# Altium PCB ZAtechSensor3 v1_01.PCBDOC
Units mm, origin at the board's own origin, x right, y up, seen from the top; angles counter-clockwise.
Board outline 105.16 x 62.5 mm, 2 copper layers (Top Layer, Bottom Layer); 17 components, 29 nets, 141 pads, 107 vias.
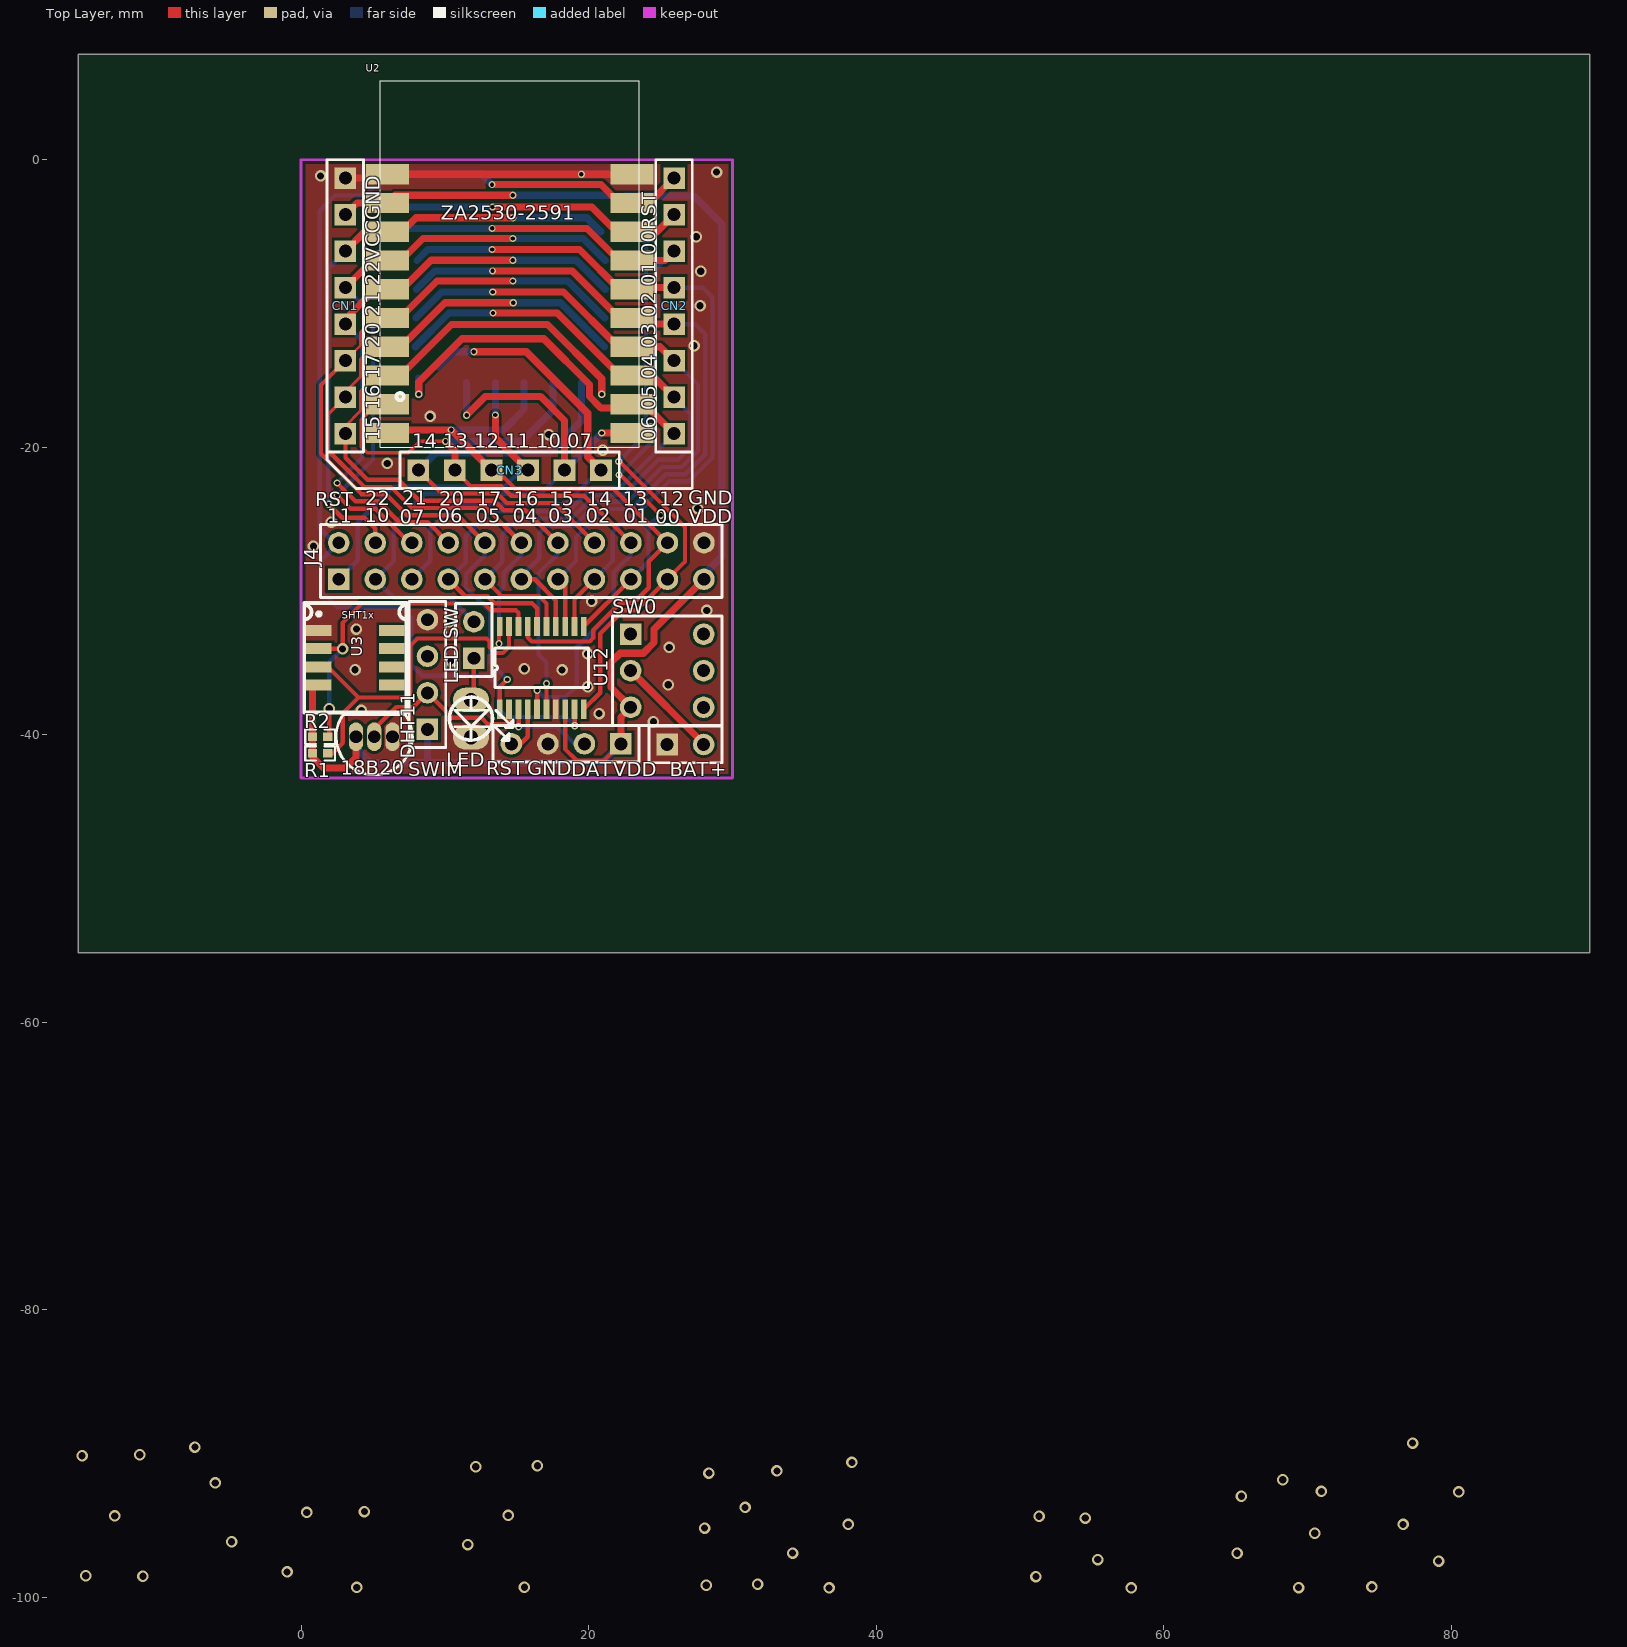
[diagram p0: Top Layer view]
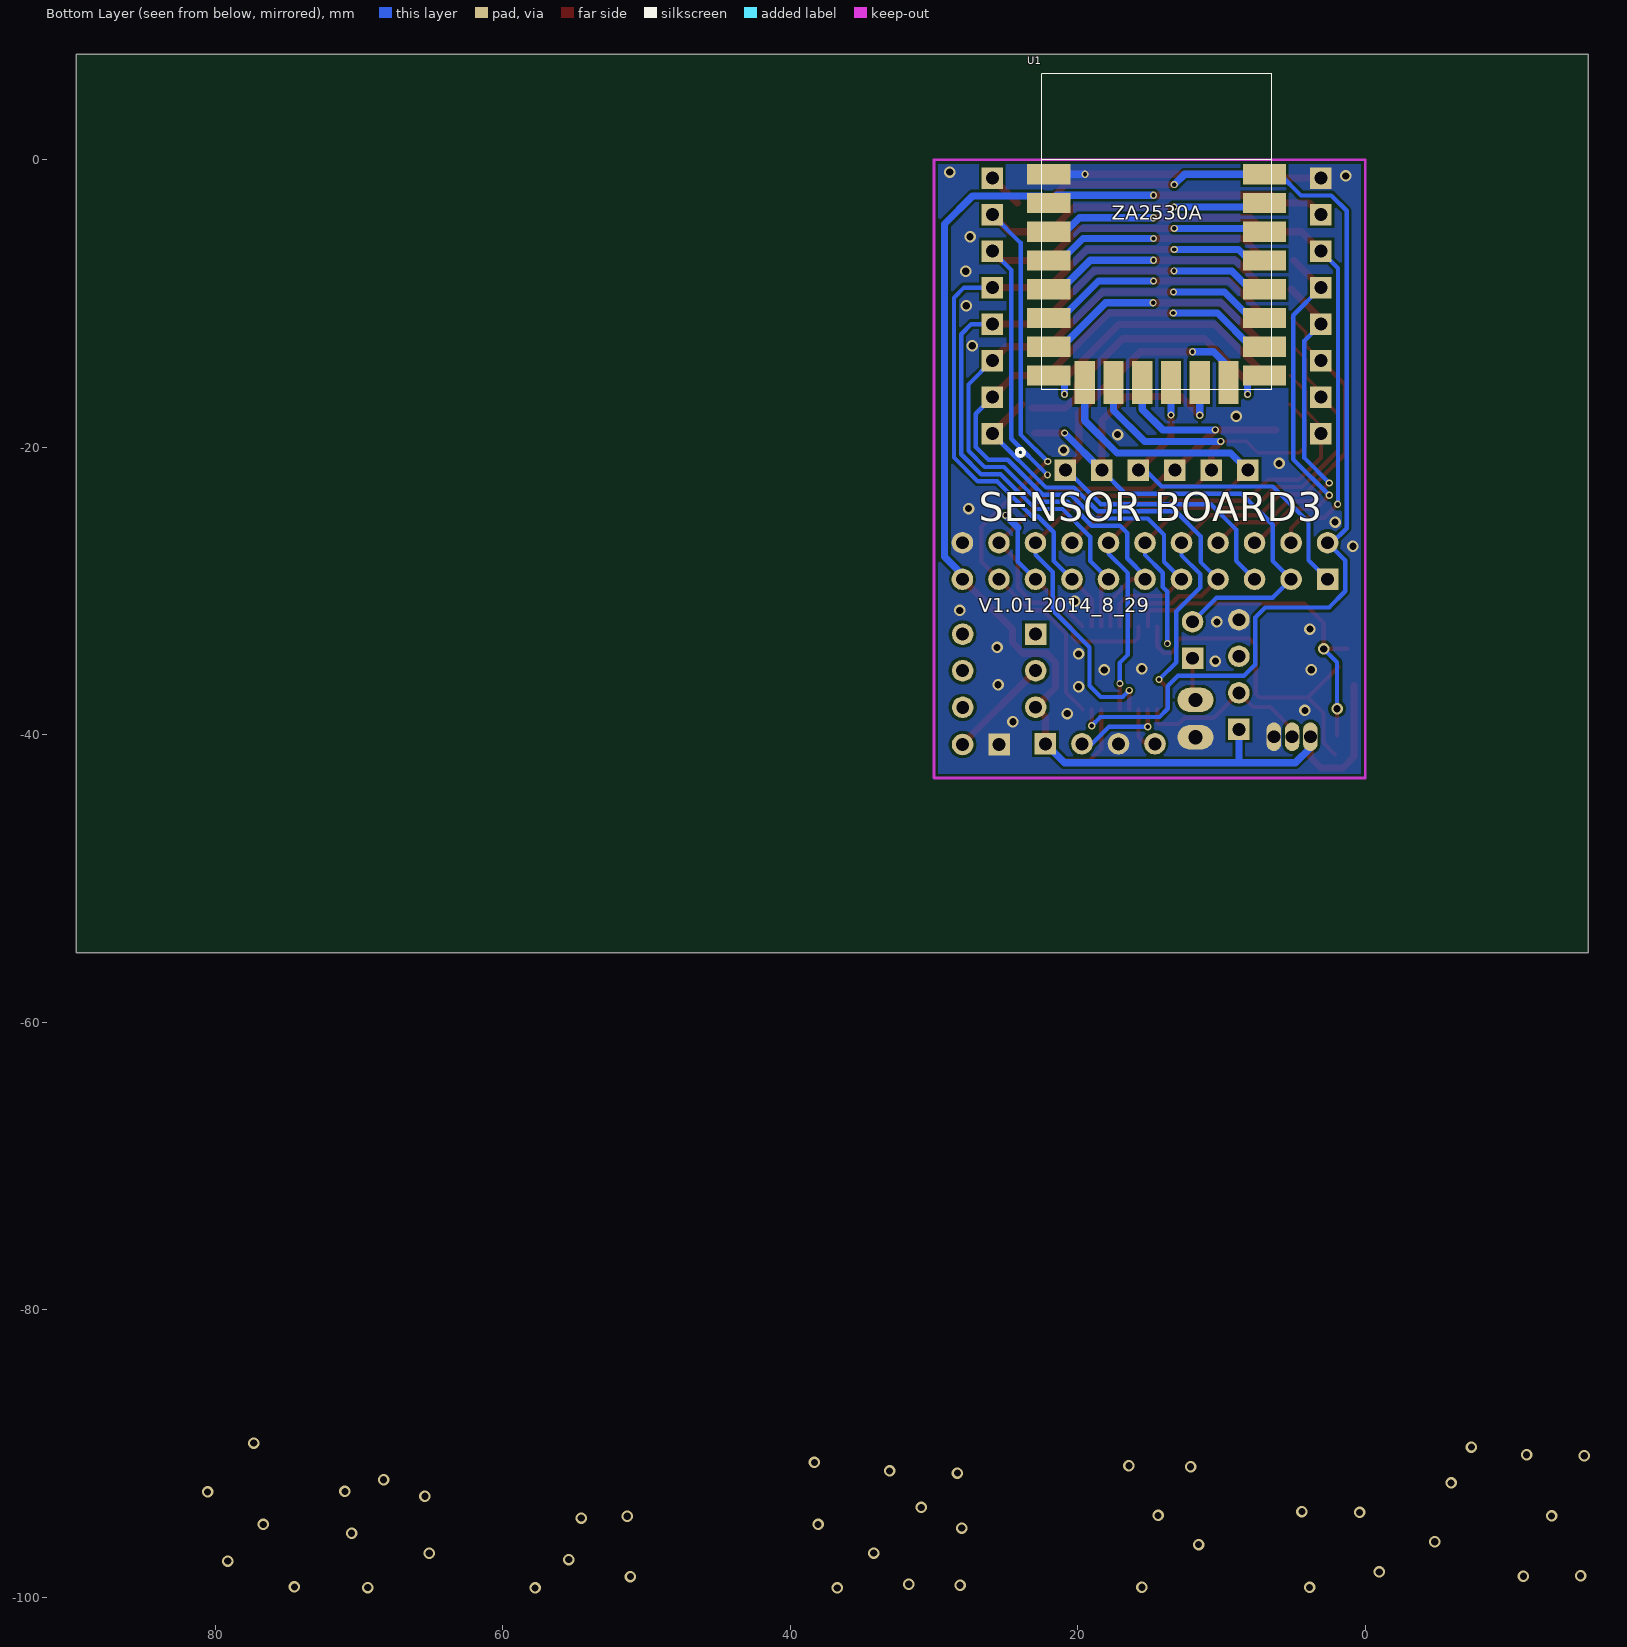
[diagram p1: Bottom Layer view, seen from below]

## Layer stack, top to bottom
Top Layer: signal copper 0.0356
Dielectric: dielectric 0.32, FR-4, Dk 4.8
Bottom Layer: signal copper 0.0356

## Board outline
-14.365,7.333 89.651,7.333 89.651,-55.168 -15.505,-55.168 -15.505,7.333

## Design rules (kind name [scope] priority, off if disabled: settings)
Clearance [All] p1: gap=0.2
ComponentClearance [All] p1 off: gap=0.254 collisioncheckmode=0
HoleSize [All] p1: absolutevalues=TRUE maxlimit=3 minlimit=0 maxpercent=80.000 minpercent=20.000
PolygonConnect [All] p1: connectstyle=Direct reliefconductorwidth=0.5 reliefentries=4 polygonreliefangle="90 Angle"
RoutingVias [All] p1: holewidth=0.5 width=0.8 viastyle="Through Hole" minholewidth=0.3 minwidth=0.5 maxholewidth=1 maxwidth=1
SolderMaskExpansion [All] p1: expansion=0.102
TestPointUsage [All] p1: valid=0 allowmultiple=FALSE
Testpoint [All] p1: side=15 testpointundercomponent=TRUE minsize=1.016 maxsize=2.54 preferedsize=1.524 minholesize=0 maxholesize=1.016 preferedholesize=0.813 testpointgrid=0.025 style=1023 order=1234567890
Width [All] p1: maxlimit=3 minlimit=0.2 preferedwidth=0.254 toplayer_prefwidth=0.3 bottomlayer_prefwidth=0.5 minimp=50.000000 maximp=50.000000 favimp=50.000000
16 further rules are at their usual default settings.

## Components (designator, comment, footprint, x,y, rotation, side; value= is the part's Value field where it differs from the comment)
18B20 "18B20" BCY-W3 5.085,-40.132 r90 top
BAT "BAT" HDR1X2 25.463,-40.671 r0 top
CN1 "" HDR1X8 3.08,-1.27 r270 top locked (schematic designator C1)
CN2 "" HDR1X8 25.94,-1.27 r270 top locked (schematic designator C2)
CN3 "" HDR1X6 8.16,-21.59 r0 top locked (schematic designator C3)
DHT11 "DHT11" HDR1X4 8.787,-39.614 r90 top
J4 "IO" HDR2X11_CEN 2.618,-29.178 r0 top
LED "LED3" LED1-3MM 11.81,-38.688 r270 top
"LED SW" "LED SW" HDR1X2 12.011,-34.673 r90 top
R1 "4.7K" 0402 0.79,-41.283 r90 top
R2 "4.7K" 0402 0.79,-40.13 r90 top
SW0 "SWITCH" SW5 22.921,-32.998 r0 top
SWIM "RST  GND  DATA  VDD" HDR1X4 22.243,-40.621 r180 top
U1 "ZigbeeModule1" 2530Module1 22.51,-16 r180 bottom locked
U2 "ZigbeeModule" 2591Module 5.51,-20 r0 top locked
U3 "SHT10" SHT10 3.775,-34.638 r0 top
U12 "STM8L101F3" TSSOP20 13.815,-38.211 r90 top

## Footprints (in the part's own frame and the unit in brackets; to place one, negate y for a bottom-side part, rotate by r counter-clockwise, add the part's x,y. Pads: shape width x height; smd on the part's side, far side on the other; paste and mask are expansions set on the pad)
0402 [mm]
  rect 0.6x0.635 smd: 1(0,0) 2(-0.004,-1.062)
  silkscreen extent -0.51,-1.56 0.5,0.5
2530Module1 [mm]
  rect 3x1.4 smd: GND(0.5,15) P0.0(15.5,13) P0.1(15.5,11) P0.2(15.5,9) P0.3(15.5,7) P0.4(15.5,5) P0.5(15.5,3) P0.6(15.5,1) P1.5(0.5,1) P1.6(0.5,3) P1.7(0.5,5) P2.0(0.5,7) P2.1(0.5,9) P2.2(0.5,11) RST(15.5,15) VDD(0.5,13)
  rect 1.4x3 smd: P0.7(13,0.5) P1.0(11,0.5) P1.1(9,0.5) P1.2(7,0.5) P1.3(5,0.5) P1.4(3,0.5)
  silkscreen extent 0,0 16,22
2591Module [mm]
  rect 3x1.4 smd: GND(0.5,19) GND(17.5,19) P0.0(17.5,15) P0.1(17.5,13) P0.2(17.5,11) P0.3(17.5,9) P0.4(17.5,7) P0.5(17.5,5) P0.6(17.5,3) P1.0(17.5,1) P1.2(0.5,1) P1.3(0.5,3) P1.5(0.5,5) P1.6(0.5,7) P1.7(0.5,9) P2.0(0.5,11) P2.1(0.5,13) P2.2(0.5,15) RST(17.5,17) VDD(0.5,17)
  silkscreen extent 0,0 18,25.5
BCY-W3 [mm]
  oval 2x1 hole 0.9: 1(0,-1.27) 2(0,0) 3(0,1.27)
  silkscreen extent -2.65,-2.65 1.55,2.65
HDR1X2 [mm] "Connector; Header; 2 Position"
  rect 1.5x1.5 hole 0.9: 1(0,0)
  round 1.5 hole 0.9: 2(2.54,0)
  silkscreen extent -1.27,-1.27 3.81,1.27
HDR1X4 [mm] "Connector; Header; 4 Position"
  rect 1.5x1.5 hole 0.9: 1(0,0)
  round 1.5 hole 0.9: 2(2.54,0) 3(5.08,0) 4(7.62,0)
  silkscreen extent -1.27,-1.27 8.89,1.27
HDR1X6 [mm] "Connector; Header; 6 Position"
  rect 1.5x1.5 hole 0.9: 1(0,0) 2(2.54,0) 3(5.08,0) 4(7.62,0) 5(10.16,0) 6(12.7,0)
  silkscreen extent -1.27,-1.27 13.97,1.27
HDR1X8 [mm] "Connector; Header; 8 Position"
  rect 1.5x1.5 hole 0.9: 1(0,0) 2(2.54,0) 3(5.08,0) 4(7.62,0) 5(10.16,0) 6(12.7,0) 7(15.24,0) 8(17.78,0)
  silkscreen extent -1.27,-1.27 19.05,1.27
HDR2X11_CEN [mm] "Connector; Header; 11x2 Position"
  rect 1.5x1.5 hole 0.9: 1(0,0)
  round 1.5 hole 0.9: 2(2.54,0) 3(5.08,0) 4(7.62,0) 5(10.16,0) 6(12.7,0) 7(15.24,0) 8(17.78,0) 9(20.32,0) 10(22.86,0) 11(25.4,0) 12(0,2.54) 13(2.54,2.54) 14(5.08,2.54) 15(7.62,2.54) 16(10.16,2.54) 17(12.7,2.54) 18(15.24,2.54) 19(17.78,2.54) 20(20.32,2.54) 21(22.86,2.54) 22(25.4,2.54)
  silkscreen extent -1.27,-1.27 26.67,3.81
LED1-3MM [mm]
  oval 1.7x2.5 hole 0.991: 1(-1.117,0.002) 2(1.483,0.002)
  silkscreen extent -1.32,-1.49 1.71,2.92
SHT10 [mil]
  rect 70x30 smd: 1(-100,75) 2(-100,25) 3(-100,-25) 4(-100,-75) 5(100,-75) 6(100,-25) 7(100,25) 8(100,75)
  silkscreen extent -140,-150 140,150
SW5 [mm]
  round 1.5 hole 0.9: 1(0,-2.54) 3(0,-5.08) 4(5.08,-2.54) 5(5.08,0) 6(5.076,-5.086)
  rect 1.5x1.5 hole 0.9: 2(0,0)
  silkscreen extent -1.27,-6.35 6.35,1.27
TSSOP20 [mm]
  rect 1.35x0.4 smd: 1(0,0) 2(0,-0.65) 3(0,-1.3) 4(0,-1.95) 5(0,-2.6) 6(0,-3.25) 7(0,-3.9) 8(0,-4.55) 9(0,-5.2) 10(0,-5.85) 11(5.75,-5.85) 12(5.75,-5.2) 13(5.75,-4.55) 14(5.75,-3.9) 15(5.75,-3.25) 16(5.75,-2.6) 17(5.75,-1.95) 18(5.75,-1.3) 19(5.75,-0.65) 20(5.75,0)
  silkscreen extent 1.51,-6.18 4.24,0.33

## Part data
18B20: library part NPN, "NPN Bipolar Transistor"
BAT: library part CON2
CN1 CN2: library part Cap, "0603U"
CN3: library part "Header 6", "Header, 6-Pin"
DHT11 SWIM: library part "Header 4", "Header, 4-Pin"
J4: library part CON3, "Connector"
LED: "Typical BLUE SiC LED"
"LED SW" SW0: library part SW-SPST, "Single-Pole, Single-Throw Switch"
R1 R2: library part Res2, "Resistor"
U1 U2: library part Component_1

## Via types
v1: diameter 0.8, hole 0.5, Top Layer to Bottom Layer, 73 vias
v2: diameter 0.5, hole 0.3, Top Layer to Bottom Layer, 34 vias

## Nets (pads, with @x,y where several pads share a name; then routed paths per layer and width w, separated by ;. In a path a pad name is that pad's centre, name@x,y a point inside that pad or via, vN(x,y) a via of type N, cw(c..) or ccw(c..) an arc to the next point about the centre after c; other vN are vias at no path point)
"18B20/DHT11 DATA": 18B20.2 DHT11.2 U12.2 | length 12.3
  Top Layer w0.3: 18B20.2@5.085,-39.59 6.612,-38.063 7.798,-38.063 DHT11.2 10.529,-38.816 12.545,-38.816 12.968,-39.239 14.382,-39.239 14.465,-39.156 U12.2
+3.3V: 18B20.3 CN1.2 DHT11.1 J4.11 R1.1 R2.1 SW0.3 SWIM.1 U1.VDD U2.VDD U3.4 U12.8 | length 106.3
  Top Layer w0.3: U12.8 18.365,-40.982 19.172,-41.789 21.075,-41.789 SWIM.1
  Top Layer w0.5: U3.4@0.79,-36.563 0.79,-41.54 1.55,-42.3 3.084,-42.3 3.815,-41.569 18B20.3 ; CN1.2 3.89,-3 U2.VDD ; U2.VDD@6.543,-2.467 v2(14.729,-2.467) ; SWIM.1 22.243,-38.756 SW0.3 21.545,-36.702 21.545,-34.963 22.19,-34.318 23.803,-34.318 24.54,-33.581 24.54,-32.656 J4.11
  Bottom Layer w0.5: 18B20.3@3.815,-40.893 4.867,-41.945 20.919,-41.945 SWIM.1 ; 8.787,-41.918 DHT11.1 ; v2(14.729,-2.467) U1.VDD@21.477,-2.467 ; U1.VDD@22.503,-2.507 27.306,-2.507 29.257,-4.458 29.257,-27.619 J4.11@27.701,-29.175
"+3.3V IN": BAT.2 SW0.1 | length 7.2
  Top Layer w0.5: SW0.1 BAT.2@28.017,-40.634
GND: 18B20.1 BAT.1 CN1.1 DHT11.4 J4.22 LED.2 SWIM.3 U1.GND U2.GND U3.1 U12.7 | length 22.2
  Top Layer w0.5: CN1.1 U2.GND@5.74,-1.27 ; U2.GND@6.01,-1 U2.GND@23.01,-1
  Bottom Layer w0.5: v2(19.492,-1) U1.GND
  other v1: 36.726,-99.335 57.743,-99.335 69.379,-99.32 3.871,-99.305 15.534,-99.297 74.482,-99.272 28.183,-99.149 31.755,-99.087 51.113,-98.553 -11.008,-98.528 -14.985,-98.497 -0.973,-98.226 79.117,-97.469 55.408,-97.367 65.109,-96.933 34.189,-96.913 11.587,-96.328 -4.839,-96.134 70.506,-95.538 28.059,-95.173 38.061,-94.924 76.652,-94.927 54.538,-94.486 51.329,-94.358 -12.965,-94.334 14.406,-94.298 0.392,-94.086 4.399,-94.024 30.886,-93.744 65.41,-92.967 80.525,-92.659 70.967,-92.626 -5.976,-92.041 68.286,-91.818 28.369,-91.352 33.091,-91.197 12.151,-90.915 16.436,-90.84 38.31,-90.606 -15.233,-90.141 -11.226,-90.079 -7.386,-89.54 77.317,-89.269 24.505,-39.092 20.722,-38.524 4.198,-38.296 19.935,-36.657 25.535,-36.515 18.151,-35.487 3.749,-35.473 15.528,-35.398 10.422,-34.863 19.935,-34.375 25.607,-33.913 3.85,-32.644 10.315,-32.143 28.209,-31.347 20.206,-30.716 0.857,-26.884 2.095,-25.2 27.595,-24.263 5.989,-21.12 20.979,-20.196 17.227,-19.112 8.973,-17.855 27.334,-12.937 27.753,-10.155 27.791,-7.754 27.486,-5.353 1.353,-1.122 28.896,-0.856
I2CSCK: R1.2 U3.3 U12.19 | length 24.1
  Top Layer w0.3: U3.3@1.873,-35.273 3.995,-37.395 ; R1.2@2.097,-41.36 2.904,-40.553 2.904,-38.487 3.995,-37.395 ; U12.19 14.465,-33.873 14.034,-34.304 13.517,-34.304 13.111,-33.898 13.111,-33.514 12.899,-33.302 8.088,-33.302 7.605,-33.785 7.605,-37.157 7.367,-37.395 3.995,-37.395
I2CSDA: R2.2 U3.2 U12.18 | length 23.9
  Top Layer w0.3: U3.2@1.252,-34.02 v1(2.885,-34.02) 2.885,-32.214 4.242,-30.857 12.725,-30.857 13.208,-31.34 14.951,-31.34 15.115,-31.504 U12.18 ; R2.2@1.962,-40.035 v1(1.962,-38.189)
  Bottom Layer w0.3: v1(1.962,-38.189) 1.962,-34.943 v1(2.885,-34.02)
LED_SW: "LED SW.1" LED.1 | length 2.4
  Top Layer w0.3: LED.1@12.011,-37.043 12.011,-34.673
P0.0/A0.0: CN2.2 J4.10 U1.P0.0 U2.P0.0 U12.10 | length 60.2
  Top Layer w0.3: U12.10 20.809,-37.067 20.809,-32.958 22.442,-31.325 23.331,-31.325 24.007,-30.649 J4.10 26.704,-27.952 26.704,-25.54 22.155,-20.991 v2(22.087,-20.991)
  Top Layer w0.5: v2(13.307,-3.28) 20.216,-3.28 U2.P0.0@21.936,-5 ; U2.P0.0 24.75,-5 CN2.2
  Bottom Layer w0.3: v2(22.087,-20.991) 23.971,-19.107 23.971,-5.779 CN2.2
  Bottom Layer w0.5: U1.P0.0@7.29,-3.28 v2(13.307,-3.28)
P0.1/A0.1: CN2.3 J4.9 U1.P0.1 U2.P0.1 U12.11 | length 50.2
  Top Layer w0.3: U12.11 19.665,-32.451 J4.9 ; v2(22.105,-21.918) 22.21,-21.918 v2(25.025,-24.733)
  Top Layer w0.5: v2(13.285,-4.77) 19.877,-4.77 U2.P0.1@22.107,-7 ; U2.P0.1 25.29,-7 CN2.3
  Bottom Layer w0.3: v2(22.105,-21.918) 24.621,-19.402 24.621,-7.669 CN2.3 ; J4.9 24.162,-27.954 24.162,-25.596
  Bottom Layer w0.5: U1.P0.1@7.24,-4.77 v2(13.285,-4.77) ; 24.162,-25.596 v2(25.025,-24.733)
P0.2/A0.2: CN2.4 J4.8 U1.P0.2 U2.P0.2 U12.12 | length 49.2
  Top Layer w0.3: U12.12 19.015,-30.561 J4.8
  Top Layer w0.5: v2(13.285,-6.237) 19.358,-6.237 U2.P0.2@22.121,-9 ; U2.P0.2@23.12,-8.89 CN2.4
  Bottom Layer w0.3: J4.8 21.668,-27.908 21.668,-25.909 22.783,-24.794 23.17,-24.794 25.597,-22.367 26.948,-22.367 28.611,-20.704 28.611,-9.592 27.909,-8.89 CN2.4
  Bottom Layer w0.5: U1.P0.2@8.052,-7 8.815,-6.237 v2(13.285,-6.237)
P0.3/A0.3: CN2.5 J4.7 U1.P0.3 U2.P0.3 U12.13 | length 47.3
  Top Layer w0.3: U12.13 J4.7@18.365,-29.337
  Top Layer w0.5: v2(13.307,-7.727) 18.861,-7.727 U2.P0.3@22.134,-11 ; U2.P0.3@23.44,-11.43 CN2.5
  Bottom Layer w0.3: J4.7 19.126,-27.91 19.126,-26.23 21.062,-24.294 22.941,-24.294 25.368,-21.867 26.716,-21.867 28.107,-20.476 28.107,-12.131 27.406,-11.43 CN2.5
  Bottom Layer w0.5: U1.P0.3@8.016,-9 9.289,-7.727 v2(13.307,-7.727)
P0.4/A0.4: CN2.6 J4.6 U1.P0.4 U2.P0.4 U12.14 | length 48.8
  Top Layer w0.3: J4.6 16.248,-29.178 17.715,-30.645 U12.14
  Top Layer w0.5: v2(13.33,-9.195) 18.252,-9.195 U2.P0.4@22.057,-13 ; U2.P0.4 24.97,-13 CN2.6
  Bottom Layer w0.3: J4.6@15.001,-29.175 15.158,-29.018 J4.6@15.266,-28.91 ; J4.6@15.318,-28.963 16.559,-27.722 16.559,-25.958 17.065,-25.452 19.023,-25.452 20.681,-23.794 22.697,-23.794 25.124,-21.367 26.476,-21.367 27.6,-20.243 27.6,-15.63 CN2.6
  Bottom Layer w0.5: U1.P0.4@7.98,-11 9.785,-9.195 v2(13.33,-9.195)
P0.5/A0.5: CN2.7 J4.5 U1.P0.5 U2.P0.5 U12.15 | length 50.3
  Top Layer w0.3: J4.5 13.94,-30.34 16.544,-30.34 17.065,-30.861 U12.15
  Top Layer w0.5: v2(13.352,-10.662) 17.822,-10.662 U2.P0.5@22.16,-15 ; U2.P0.5 24.43,-15 CN2.7
  Bottom Layer w0.3: J4.5 13.992,-27.964 13.992,-26.081 15.121,-24.952 18.816,-24.952 20.474,-23.294 22.433,-23.294 24.86,-20.867 26.209,-20.867 27.094,-19.982 27.094,-17.664 CN2.7
  Bottom Layer w0.5: U1.P0.5@7.944,-13 10.282,-10.662 v2(13.352,-10.662)
P0.6/A0.6: CN2.8 J4.4 U1.P0.6 U2.P0.6 U12.16 | length 52.8
  Top Layer w0.3: J4.4 11.417,-30.357 12.972,-30.357 13.455,-30.84 16.058,-30.84 16.415,-31.197 U12.16
  Top Layer w0.5: v2(8.182,-16.307) 8.182,-15.449 11.185,-12.446 16.874,-12.446 20.058,-15.63 20.058,-16.465 20.848,-17.255 U2.P0.6@23.173,-17.255 ; U2.P0.6@23.89,-17 CN2.8
  Bottom Layer w0.3: J4.4 11.449,-27.967 11.449,-26.18 13.177,-24.452 18.606,-24.452 20.264,-22.794 22.196,-22.794 CN2.8
  Bottom Layer w0.5: v2(8.182,-16.307) U1.P0.6@8.182,-15.178
P0.7/HGM: CN3.6 J4.3 U1.P0.7 | length 34.5
  Top Layer w0.5: v2(12.014,-13.345) 15.654,-13.345 19.933,-17.624 19.933,-20.663 CN3.6
  Bottom Layer w0.3: J4.3 8.981,-27.895 8.981,-25.711 10.74,-23.952 18.392,-23.952 CN3.6@20.754,-21.59
  Bottom Layer w0.5: U1.P0.7@9.51,-14.392 10.557,-13.345 v2(12.014,-13.345)
P1.0/LED: "LED SW.2" CN3.5 J4.2 U1.P1.0 U2.P1.0 | length 45.4
  Top Layer w0.5: v2(11.51,-17.767) 12.81,-16.467 16.661,-16.467 18.32,-18.126 CN3.5 ; v2(20.91,-19) U2.P1.0
  Bottom Layer w0.3: 12.011,-32.133 10.339,-30.461 6.441,-30.461 J4.2 6.438,-27.898 6.438,-25.39 8.604,-23.224 16.686,-23.224 CN3.5
  Bottom Layer w0.5: v2(11.51,-17.767) U1.P1.0 ; CN3.5 v2(20.91,-19)
P1.1/PAEN: CN3.4 J4.1 U1.P1.1 | length 24.4
  Top Layer w0.5: v2(13.51,-17.755) 13.51,-19.32 CN3.4
  Bottom Layer w0.3: J4.1 3.945,-27.851 3.945,-25.218 6.439,-22.724 14.151,-22.724 CN3.4@15.285,-21.59
  Bottom Layer w0.5: v2(13.51,-17.755) U1.P1.1
P1.2/A0.7: CN3.3 J4.21 U1.P1.2 U2.P1.2 U12.17 | length 44.5
  Top Layer w0.3: CN3.3@13.593,-21.59 14.877,-22.874 21.714,-22.874 J4.21 24.175,-27.941 24.175,-29.774 23.134,-30.815 22.224,-30.815 20.309,-32.73 20.309,-33.265 20.073,-33.501 16.047,-33.501 15.765,-33.219 U12.17
  Top Layer w0.5: U2.P1.2@6.226,-18.784 v2(10.434,-18.784) CN3.3
  Bottom Layer w0.5: v2(10.434,-18.784) 14.087,-18.784 15.51,-17.361 U1.P1.2
P1.3/WAKEIN: CN3.2 J4.20 U1.P1.3 U2.P1.3 U12.5 | length 52.8
  Top Layer w0.25: U2.P1.3@5.25,-17 4.171,-18.079 4.171,-19.949 4.6,-20.378 7.466,-20.378 8.26,-19.584 v2(10.044,-19.584)
  Top Layer w0.3: CN3.2 11.826,-22.716 13.941,-22.716 14.599,-23.374 19.674,-23.374 J4.20 ; U12.5 v2(16.415,-36.907)
  Top Layer w0.5: v2(10.044,-19.584) 10.7,-20.24 CN3.2
  Bottom Layer w0.3: v2(16.415,-36.907) 16.875,-37.367 18.392,-37.367 19.174,-36.585 19.174,-33.906 21.742,-31.338 21.742,-28.674 22.938,-27.478 J4.20
  Bottom Layer w0.5: v2(10.044,-19.584) 15.36,-19.584 17.51,-17.434 U1.P1.3
P1.4/EN: CN3.1 J4.19 U1.P1.4 | length 29.7
  Top Layer w0.3: CN3.1 9.786,-23.216 13.638,-23.216 14.296,-23.874 17.634,-23.874 J4.19
  Bottom Layer w0.5: CN3.1 9.365,-20.385 17.268,-20.385 19.51,-18.143 U1.P1.4
P1.5/WAKEOUT: CN1.8 J4.18 U1.P1.5 U2.P1.5 U12.6 | length 55.1
  Top Layer w0.2: CN1.8 3.08,-18.512 4.132,-17.46 4.132,-16.103 U2.P1.5@5.235,-15
  Top Layer w0.3: CN1.8 3.08,-20.723 4.613,-22.256 6.755,-22.256 8.215,-23.716 13.431,-23.716 14.094,-24.379 15.599,-24.379 J4.18 ; U12.6 v2(17.065,-36.431)
  Top Layer w0.5: U2.P1.5@6.915,-15 10.463,-11.452 17.145,-11.452 20.916,-15.223 v2(20.916,-16.307)
  Bottom Layer w0.3: v2(17.065,-36.431) 17.065,-34.977 16.509,-34.421 16.509,-28.75 17.858,-27.401 J4.18
  Bottom Layer w0.5: v2(20.916,-16.307) U1.P1.5@20.916,-15.516
P1.6/TX1ALT2: CN1.7 J4.17 U1.P1.6 U2.P1.6 U12.20 | length 50.3
  Top Layer w0.2: CN1.7@3.08,-16.137 4.132,-15.085 4.132,-13.865 U2.P1.6@4.997,-13
  Top Layer w0.25: 1.891,-20.241 1.891,-17.699 CN1.7
  Top Layer w0.3: 1.891,-20.241 2.926,-21.275 ; 3.308,-21.658 2.926,-21.275 ; v2(13.764,-33.656) U12.20@13.764,-32.512 ; J4.17 12.896,-24.216 7.715,-24.216 6.255,-22.756 4.406,-22.756 2.926,-21.275
  Top Layer w0.5: U2.P1.6@6.95,-13 10.01,-9.94 v2(14.752,-9.94)
  Bottom Layer w0.3: v2(13.764,-33.656) 13.764,-30.041 14.09,-29.715 14.09,-28.723 15.318,-27.495 J4.17
  Bottom Layer w0.5: v2(14.752,-9.94) 18.048,-9.94 U1.P1.6@21.108,-13
P1.7/RX1ALT2: CN1.6 J4.16 U1.P1.7 U2.P1.7 U12.1 | length 54.9
  Top Layer w0.2: CN1.6 4.132,-12.918 4.132,-11.999 U2.P1.7@5.131,-11
  Top Layer w0.3: CN1.6 1.386,-15.664 1.386,-20.443 3.177,-22.234 4.199,-23.256 5.883,-23.256 7.343,-24.716 10.856,-24.716 J4.16 ; U12.1 13.815,-36.679 v2(14.339,-36.155)
  Top Layer w0.5: U2.P1.7@6.874,-11 9.447,-8.427 v2(14.729,-8.427)
  Bottom Layer w0.3: J4.16 12.778,-27.517 11.474,-28.821 11.474,-29.746 13.136,-31.408 13.136,-34.952 v2(14.339,-36.155) ; v2@14.353,-36.141 v2@14.367,-36.155
  Bottom Layer w0.5: v2(14.729,-8.427) 18.545,-8.427 U1.P1.7@21.118,-11
P2.0/A1.0: CN1.5 J4.15 U1.P2.0 U2.P2.0 | length 40.4
  Top Layer w0.3: v2(2.502,-22.476) 3.782,-23.756 5.371,-23.756 6.831,-25.216 8.816,-25.216 J4.15
  Top Layer w0.5: CN1.5@3.08,-11.066 U2.P2.0@5.146,-9 ; U2.P2.0@7.022,-9 9.04,-6.982 v2(14.729,-6.982)
  Bottom Layer w0.3: v2(2.502,-22.476) 4.234,-20.744 4.234,-12.584 CN1.5
  Bottom Layer w0.5: v2(14.729,-6.982) 19.131,-6.982 U1.P2.0@21.149,-9
P2.1/DD/A1.1: CN1.4 J4.14 U1.P2.1 U2.P2.1 | length 40.8
  Top Layer w0.3: v2(2.502,-23.335) 3.116,-23.949 3.447,-24.28 5.188,-24.28 J4.14@7.546,-26.638
  Top Layer w0.5: CN1.4 U2.P2.1@4.97,-7 ; U2.P2.1@6.945,-7 8.475,-5.47 v2(14.729,-5.47)
  Bottom Layer w0.3: v2(2.502,-23.335) 5,-20.837 5,-10.81 CN1.4
  Bottom Layer w0.5: v2(14.729,-5.47) 19.629,-5.47 U1.P2.1@21.159,-7
P2.2/DC/A1.2/485EN: CN1.3 J4.13 U1.P2.2 U2.P2.2 | length 41.1
  Top Layer w0.3: v2(1.92,-23.963) 2.854,-24.897 4.414,-24.897 5.158,-25.641 J4.13
  Top Layer w0.5: CN1.3 4.43,-5 U2.P2.2 ; U2.P2.2@7.019,-5 7.994,-4.025 v2(14.729,-4.025)
  Bottom Layer w0.3: v2@1.889,-23.932 1.889,-7.541 CN1.3
  Bottom Layer w0.5: v2(14.729,-4.025) 19.872,-4.025 U1.P2.2@20.847,-5
RST: CN2.1 J4.12 U1.RST U2.RST U12.9 | length 77
  Top Layer w0.3: v2(19.028,-39.369) U12.9@19.028,-38.224
  Top Layer w0.5: v2(13.283,-1.726) 20.856,-1.726 U2.RST@22.13,-3 ; U2.RST@24.21,-3 CN2.1
  Bottom Layer w0.3: J4.12@2.301,-26.635 1.29,-25.624 1.29,-3.549 2.358,-2.481 4.469,-2.481 U1.RST@5.95,-1 ; J4.12 1.754,-27.502 1.392,-27.864 1.392,-30.017 2.513,-31.138 6.952,-31.138 7.649,-31.835 7.649,-35.115 8.429,-35.895 13.022,-35.895 13.739,-36.612 13.739,-38.188 14.315,-38.764 18.423,-38.764 v2(19.028,-39.369)
  Bottom Layer w0.5: U1.RST 12.557,-1 v2(13.283,-1.726)
SWIM: SWIM.2 U12.3 | length 5.9
  Top Layer w0.3: v2(15.129,-39.432) U12.3@15.129,-38.225
  Bottom Layer w0.3: v2(15.129,-39.432) 17.822,-39.432 SWIM.2@19.234,-40.844
SWIM_RST: SWIM.4 U12.4 | length 2.9
  Top Layer w0.3: SWIM.4@15.099,-40.796 15.765,-40.13 U12.4
pads on no net: DHT11.3 SW0.2 SW0.4 SW0.5 SW0.6 U3.5 U3.6 U3.7 U3.8

## Polygon pours and split planes (outlines as drawn)
GND on Top Layer (solid, remove dead copper): -0.047,-0.021 30.015,-0.021 30.015,-42.991 -0.023,-42.991 -0.023,0.016
GND on Bottom Layer (solid, remove dead copper): -0.071,0.026 29.992,0.026 29.992,-42.999 -0.036,-42.999 -0.036,0.201

## Keep-outs
Keep-Out Layer:
  lines w0.2: 1.81,0 27.21,0 ; 0,-43 30,-43 30,0 0,0 0,-43

## Silkscreen, mask and mechanical layers (free items; w line width, h text height)
Top Overlay:
  circle w0.254: c6.884,-16.472 r0.254
  lines w0.2: 1.81,0 1.81,-20.86 3.81,-22.86 27.21,-22.86 27.21,0
  text "ZA2530-2591" at 9.695,-4.16 h1
  text "15 16 17 20 21 22VCCGND" at 5.458,-19.55 h1 r90
  text "06 05 04 03 02 01 00RST" at 24.67,-19.591 h1 r90
  text "14 13 12 11 10 07" at 7.713,-20.042 h1
  text "GND" at 26.941,-23.981 h1
  text "21" at 7.033,-24.005 h1
  text "22" at 4.451,-24.023 h1
  text "20" at 9.599,-24.049 h1
  text "17" at 12.231,-24.049 h1
  text "16" at 14.797,-24.071 h1
  text "15" at 17.274,-24.072 h1
  text "14" at 19.885,-24.072 h1
  text "13" at 22.362,-24.072 h1
  text "12" at 24.928,-24.072 h1
  text "RST" at 0.989,-24.101 h1
  text "11" at 1.8,-25.238 h1
  text "10" at 4.427,-25.216 h1
  text "06" at 9.515,-25.236 h1
  text "05" at 12.147,-25.236 h1
  text "04" at 14.713,-25.258 h1
  text "03" at 17.19,-25.259 h1
  text "02" at 19.801,-25.259 h1
  text "01" at 22.446,-25.246 h1
  text "VDD" at 26.946,-25.281 h1
  text "07" at 6.851,-25.304 h1
  text "00" at 24.627,-25.3 h1
  text "RST" at 12.863,-42.808 h1
  text "GND" at 15.719,-42.827 h1
  text "DAT" at 18.787,-42.876 h1
  text "VDD" at 21.704,-42.876 h1
  text "+" at 28.462,-42.876 h1
Bottom Overlay:
  circle w0.254: c23.988,-20.348 r0.254
  text "ZA2530A" at 17.619,-4.183 h1
  text "SENSOR BOARD3" at 26.876,-25.131 h2
  text "V1.01 2014_8_29" at 26.876,-31.472 h1

## Text inside footprints (layer, text, board x,y; h text height)
U3: Top Overlay "SHT1x" at 2.838,-31.907 h0.5